# Altium PCB Cavro Ribbon Interface Top.PcbDoc
Units mil, origin at the board's own origin, x right, y up, seen from the top; angles counter-clockwise.
Board outline 2106 x 1810.7 mil, 2 copper layers (Top Layer, Bottom Layer); 49 components, 41 nets, 179 pads, 45 vias.
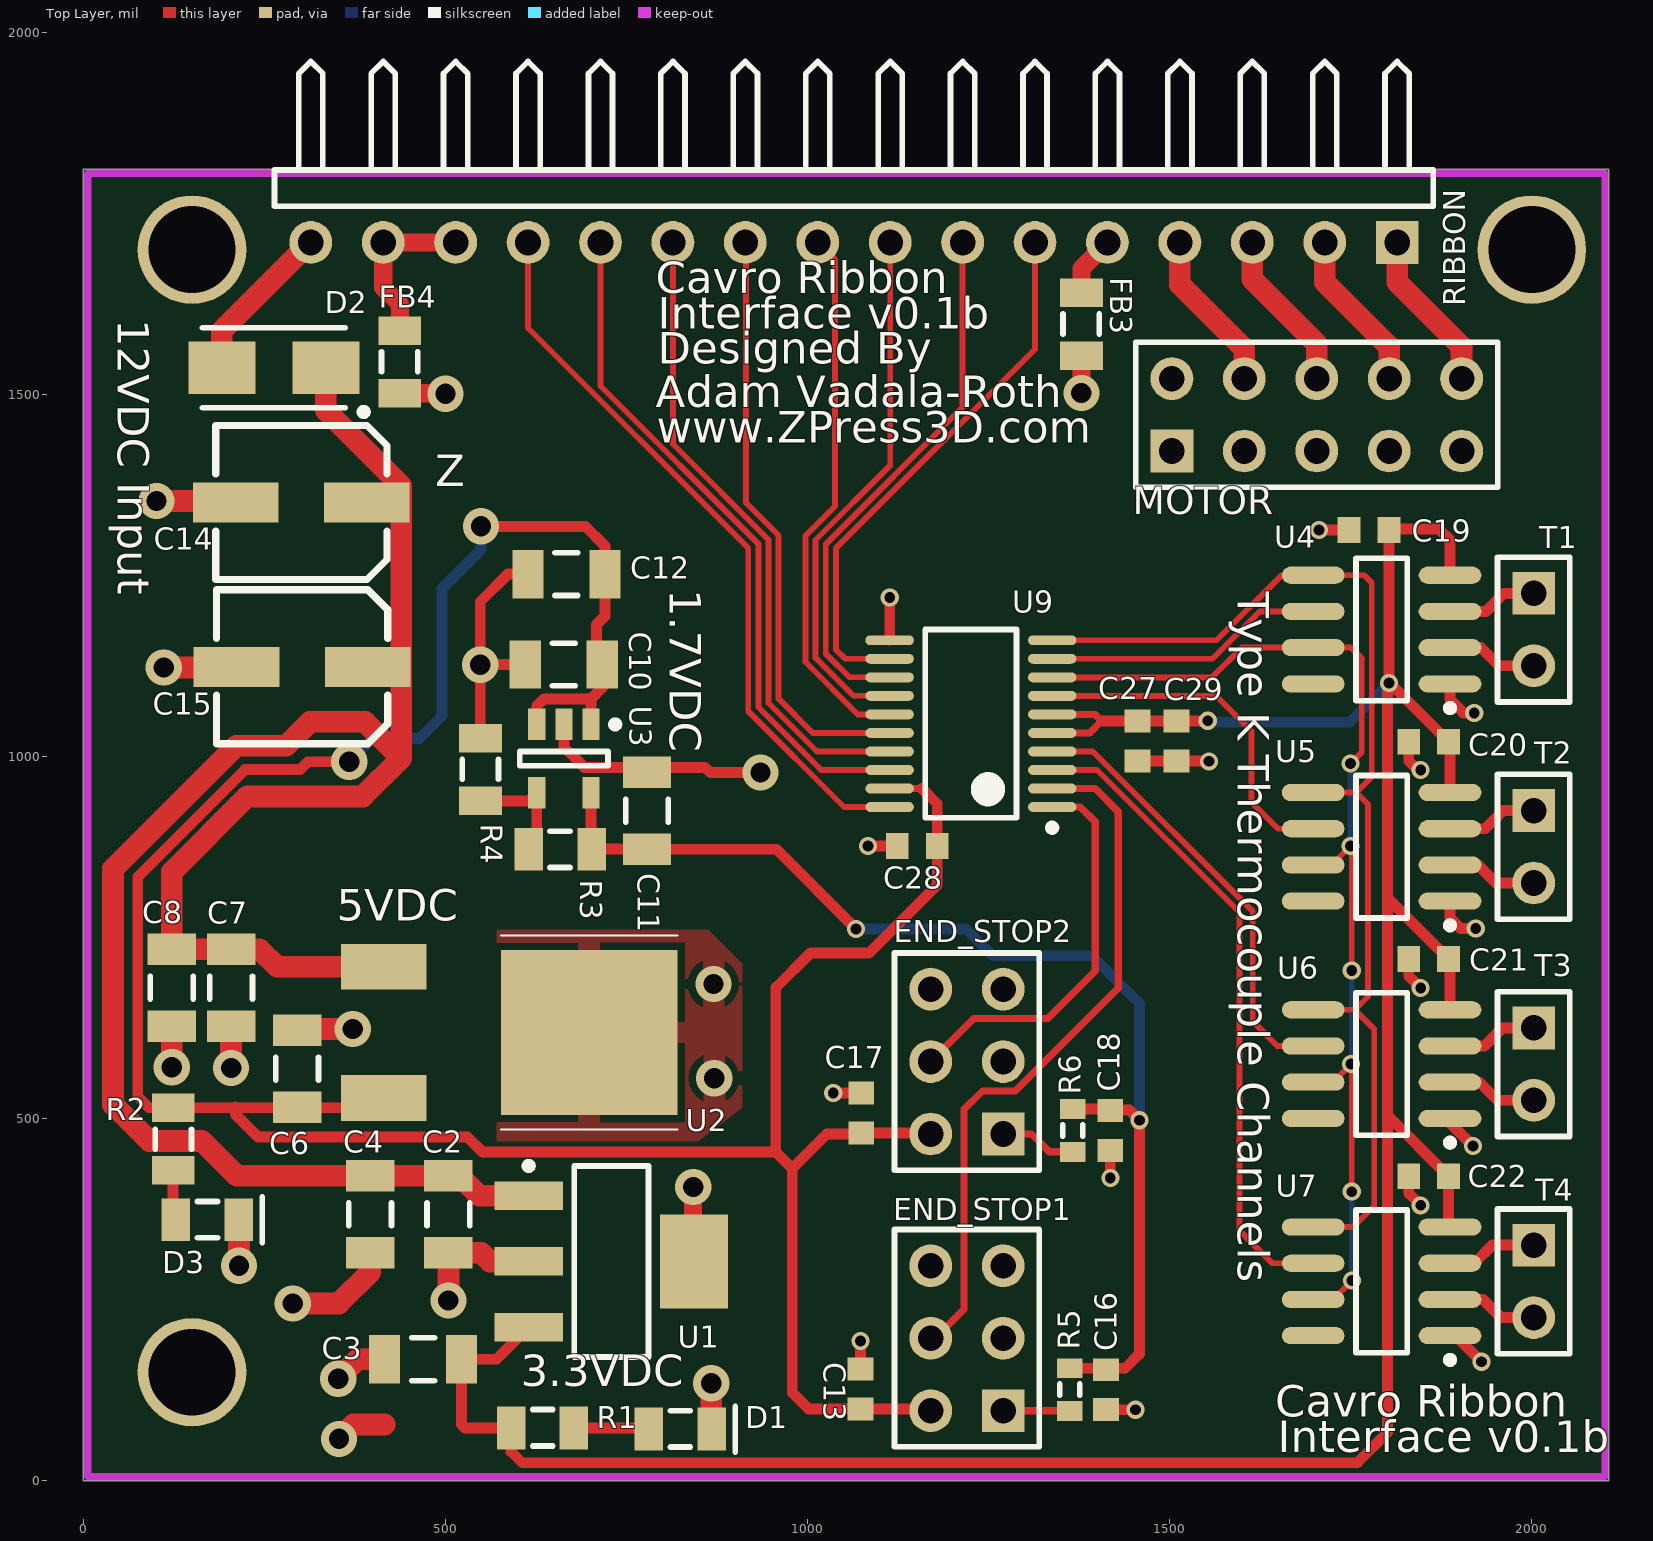
[diagram p0: Top Layer view]
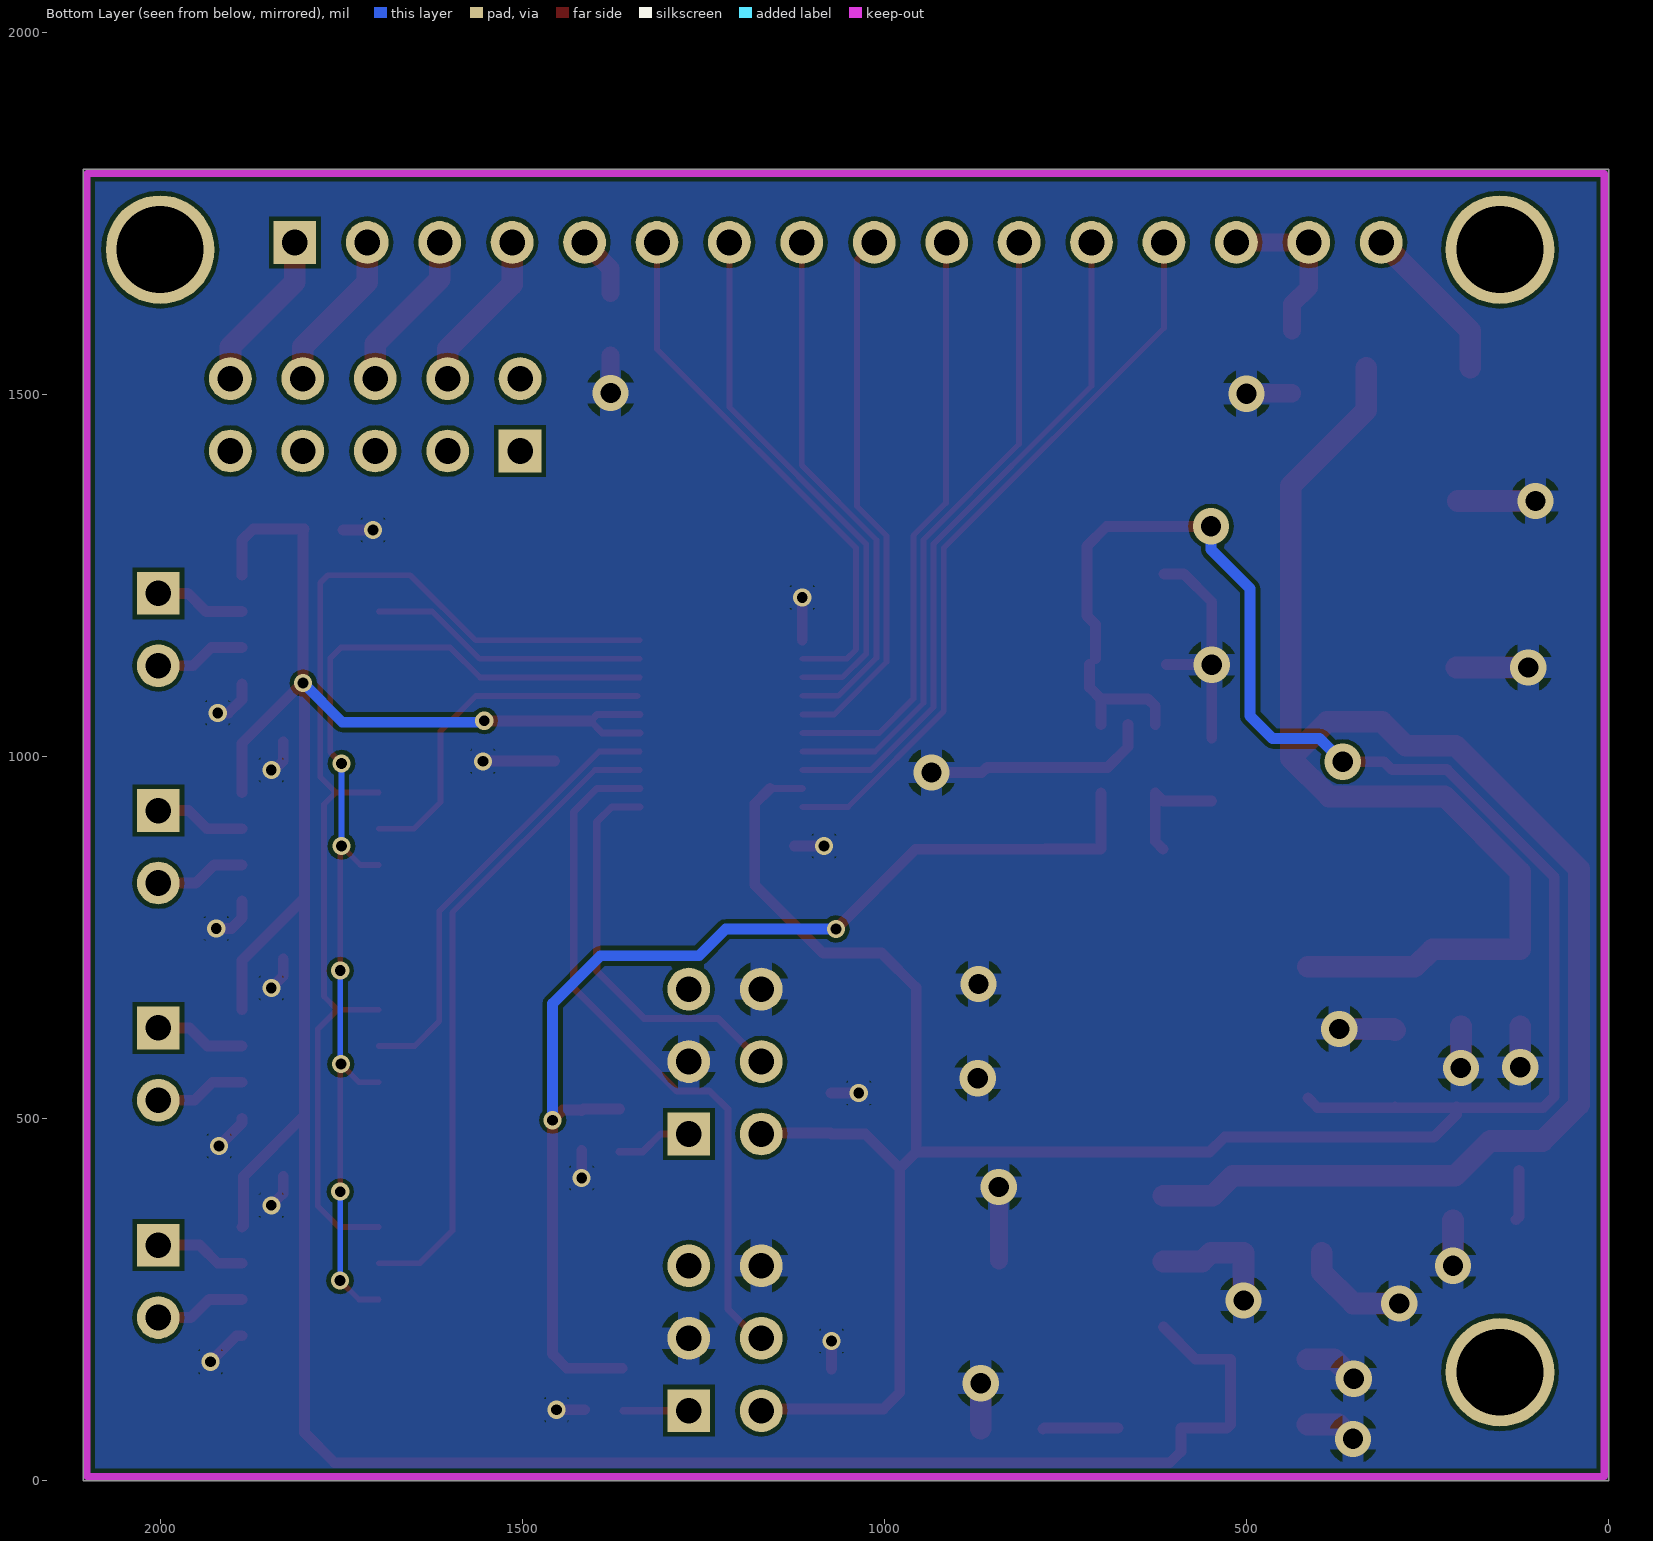
[diagram p1: Bottom Layer view, seen from below]

## Layer stack, top to bottom
Top Layer: signal copper 1.4
Dielectric: dielectric 12.6, FR-4, Dk 4.8
Bottom Layer: signal copper 1.4

## Board outline
0,0 0,1810.7 2106,1810.7 2106,0

## Design rules (kind name [scope] priority, off if disabled: settings)
Clearance [All] p1: gap=6
ComponentClearance [All] p1: gap=0 collisioncheckmode=3 verticalgap=10 showdistances=FALSE
FanoutControl Fanout_SOIC [(InComponent('U8') AND InComponent('U7'))] p3: bgadir=Out bgaviamode=Centered fanoutstyle=Staggered fanoutdirection=Alternating viagrid=1 // Fanout_SOIC (Default Rule)
FanoutControl Fanout_Small [All] p4: bgadir=Out bgaviamode=Centered fanoutstyle=Auto fanoutdirection=Alternating viagrid=1 // Fanout_Small (Default Rule)
HoleSize [All] p1: absolutevalues=TRUE maxlimit=120 minlimit=1 maxpercent=80.000 minpercent=20.000
MinimumSolderMaskSliver [All] p1 off: minsoldermaskwidth=10
PlaneConnect [All] p1: planeconnectstyle=Direct reliefexpansion=20 reliefentries=4 reliefconductorwidth=10 reliefairgap=10
PolygonConnect PolygonConnect_1 [InNet('PGND')] p1: connectstyle=Relief reliefconductorwidth=30 reliefentries=4 polygonreliefangle="90 Angle" airgapwidth=10
PolygonConnect [All] p2: connectstyle=Relief reliefconductorwidth=30 reliefentries=4 polygonreliefangle="90 Angle" airgapwidth=10
RoutingVias [All] p1: holewidth=15 width=25 viastyle="Through Hole" minholewidth=15 minwidth=25 maxholewidth=28 maxwidth=50
SilkToSilkClearance [All] p1 off: silktosilkclearance=10
SilkToSolderMaskClearance SilkscreenOverComponentPads [IsPad] p1 off: minsilkscreentomaskgap=10 clearancetoexposedcopper=TRUE
SolderMaskExpansion [All] p1: expansion=6
Width [All] p1: maxlimit=30 minlimit=6 preferedwidth=6 minimp=50.000000 maximp=50.000000 favimp=50.000000
20 further rules are at their usual default settings.

## Classes and differential pairs
component class Power: C2 C3 C4 C6 C7 C8 C10 C11 C12 D1 D3 R1 R2 R3 R4 U1 U2 U3
component class "Ribbon Interface": C13 C14 C15 C16 C17 C18 C19 C20 C21 C22 C27 C28 C29 D2 END_STOP1 END_STOP2 FB3 FB4 MOTOR R5 R6 RIBBON T1 T2 T3 T4 U4 U5 U6 U7 U9

## Components (designator, comment, footprint, x,y, rotation, side; value= is the part's Value field where it differs from the comment)
C2 "1206 Tantulum" C1206 504,368 r90 top
C3 "1206 Tantulum" C1206 469,168 r0 top
C4 "1206 Tantulum" C1206 396,368 r90 top
C6 "1206 Tantulum" C1206 295.05,569.17 r270 top
C7 "1206 Tantulum" C1206 204,681 r90 top
C8 "1206 Tantulum" C1206 122,681 r90 top
C10 "1206 Tantulum" C1206 663.4,1127.24 r0 top
C11 "1206 Tantulum" C1206 778.23,925.3 r270 top
C12 "1206 Tantulum" C1206 667,1252 r0 top
C13 "0603" 1608[0603] 1072.95,126.83 r270 top
C14 "VS C" "Panasonic VS C" 301,1351 r0 top
C15 "VS C" "Panasonic VS C" 302,1124 r0 top
C16 "0603" 1608[0603] 1412,126 r90 top
C17 "0603" 1608[0603] 1073.95,507.83 r270 top
C18 "0603" 1608[0603] 1417.95,483.83 r90 top
C19 "0603" 1608[0603] 1775,1313 r0 top
C20 "0603" 1608[0603] 1857.5,1020.5 r0 top
C21 "0603" 1608[0603] 1857.5,720.5 r0 top
C22 "0603" 1608[0603] 1857.5,420.5 r0 top
C27 "0603" 1608[0603] 1455.43,1021.57 r90 top
C28 "0603" 1608[0603] 1151.43,876.57 r0 top
C29 "0603" 1608[0603] 1509.43,1021.57 r90 top
D1 "LED2" "SM 0805 polarized" 904,28 r180 top
D2 "PMEG4050EP" PMEG4050EP 263,1537 r180 top
D3 "LED2" "SM 0805 polarized" 251,317 r180 top
END_STOP1 "Header 3X2" HDR2X3 1270,97 r90 top
END_STOP2 "Header 3X2" HDR2X3 1270,479 r90 top
FB3 "Ferrite" "SM 0805 - gap trimmed" 1378,1597 r270 top
FB4 "Ferrite" "SM 0805 - gap trimmed" 437,1545 r270 top
MOTOR "Header 5X2" HDR2X5 1503,1422 r0 top
R1 "Res3" "SM 0805 - gap trimmed" 634,73 r180 top
R2 "Res3" "SM 0805 - gap trimmed" 124,472 r90 top
R3 "Res3" "SM 0805 - gap trimmed" 658.4,872.24 r0 top
R4 "Res3" "SM 0805 - gap trimmed" 548.4,982.24 r270 top
R5 "0603" J1-0603 1362,126 r270 top
R6 "0603" J1-0603 1365.95,483.83 r270 top
RIBBON "Header 16H" HDR1X16H 1814,1710 r180 top locked
T1 "Header 2" HDR1X2 2002.5,1225.5 r270 top
T2 "Header 2" HDR1X2 2002.5,925.5 r270 top
T3 "Header 2" HDR1X2 2002.5,625.5 r270 top
T4 "Header 2" HDR1X2 2002.5,325.5 r270 top
U1 "TLV117113" TLV117112 729,303 r0 top
U2 "LM7805-ST 800ma" DPAK-3 415.05,619.17 r270 top
U3 "TPS73101" TPS73101 663.4,997.24 r270 top
U4 "MAX31855EASA+" MAXM-S8+4_N 1792.5,1175.5 r180 top
U5 "MAX31855EASA+" MAXM-S8+4_N 1792.5,875.5 r180 top
U6 "MAX31855EASA+" MAXM-S8+4_N 1792.5,575.5 r180 top
U7 "MAX31855EASA+" MAXM-S8+4_N 1792.5,275.5 r180 top
U9 "TXB0108" TXB0108 1225.43,1045.57 r180 top

## Footprints (in the part's own frame and the unit in brackets; to place one, negate y for a bottom-side part, rotate by r counter-clockwise, add the part's x,y. Pads: shape width x height; smd on the part's side, far side on the other; paste and mask are expansions set on the pad)
1608[0603] [mm] "Chip Capacitor, Body 1.6x0.8mm, IPC High Density"
  rect 0.8x0.9 smd: 1(-0.7,0) 2(0.7,0)
  body extent -0.87,-0.48 0.87,0.48, height 1.3
C1206 [mm] "Chip Capacitor, Body 3.2x1.6mm, IPC High Density"
  rect 1.1x1.7 smd: 1(-1.35,0) 2(1.35,0)
  silkscreen extent -0.4,-0.75 0.4,0.75, body extent -1.7,-0.9 1.7,0.9, height 1.3
DPAK-3 [mm] "Case 369C-01 for MC78xx regulators"
  rect 1.6x3 smd: 1(-2.3,0) 3(2.3,0)
  rect 5.8x6.2 smd: 2(0,7.2)
  silkscreen extent -3.4,4.1 3.4,10.3, body extent -3.4,4.1 3.4,10.3, height 2.38
HDR1X2 [mm] "Connector; Header; 2 Position"
  rect 1.5x1.5 hole 0.9: 1(0,0)
  round 1.5 hole 0.9: 2(2.54,0)
  silkscreen extent -1.27,-1.27 3.81,1.27
HDR1X16H [mm] "Connector; Header; 16 Position; Right Angle"
  rect 1.5x1.5 hole 0.9: 1(0,0)
  round 1.5 hole 0.9: 2(2.54,0) 3(5.08,0) 4(7.62,0) 5(10.16,0) 6(12.7,0) 7(15.24,0) 8(17.78,0) 9(20.32,0) 10(22.86,0) 11(25.4,0) 12(27.94,0) 13(30.48,0) 14(33.02,0) 15(35.56,0) 16(38.1,0)
  silkscreen extent -1.27,-6.35 39.37,-1.27
HDR2X3 [mm] "Connector; Header; 3x2 Position"
  rect 1.5x1.5 hole 0.9: 1(0,0)
  round 1.5 hole 0.9: 2(0,2.54) 3(2.54,0) 4(2.54,2.54) 5(5.08,0) 6(5.08,2.54)
  silkscreen extent -1.27,-1.27 6.35,3.81
HDR2X5 [mm] "Connector; Header; 5x2 Position"
  rect 1.5x1.5 hole 0.9: 1(0,0)
  round 1.5 hole 0.9: 2(0,2.54) 3(2.54,0) 4(2.54,2.54) 5(5.08,0) 6(5.08,2.54) 7(7.62,0) 8(7.62,2.54) 9(10.16,0) 10(10.16,2.54)
  silkscreen extent -1.27,-1.27 11.43,3.81
J1-0603 [mm] "Chip Resistor, Body 1.6x0.8mm, IPC High Density"
  rect 0.7x0.9 smd: 1(-0.75,0) 2(0.75,0)
  silkscreen extent -0.2,-0.35 0.2,0.35, body extent -0.85,-0.48 0.85,0.48, height 0.9
MAXM-S8+4_N [mm] "SOIC, 8-Leads, Body 4.9x3.9mm, Pitch 1.27mm, IPC Medium Density"
  oval 2.2x0.6 smd: 1(-2.4,1.905) 2(-2.4,0.635) 3(-2.4,-0.635) 4(-2.4,-1.905) 5(2.4,-1.905) 6(2.4,-0.635) 7(2.4,0.635) 8(2.4,1.905)
  silkscreen extent -2.53,-2.5 0.9,2.88, body extent -2,-2.5 2,2.5, height 1.75
"Panasonic VS C" [mm]
  rect 3x1.4 smd: 1(2.3,0) 2(-2.3,0)
  silkscreen extent -3,-2.7 3,2.7
PMEG4050EP [mm] "PMEG4050EP NXP SMD Schottky Diode"
  rect 2.35x1.85 smd: 1(-1.825,0) 2(1.825,0)
  silkscreen extent -3.28,-1.4 2.5,1.67, body extent -2.5,-1.35 2.5,1.35, height 1.1
"SM 0805 - gap trimmed" [mm]
  rect 1x1.5 smd: 1(-1.1,0) 2(1.1,0)
  silkscreen extent -0.36,-0.64 0.35,0.63
"SM 0805 polarized" [mm]
  rect 1x1.5 smd: 1(0.93,-1.105) 2(3.13,-1.105)
  silkscreen extent 0.1,-1.9 2.38,-0.3
TLV117112 [mm] "SOT223, 4-Leads, Body 6.7x7.3mm (max), Pitch 2.30mm, IPC Medium Density"
  rect 2.4x1 smd: 1(-2.9,2.3) 2(-2.9,0) 3(-2.9,-2.3)
  rect 2.4x3.3 smd: 4(2.9,0)
  silkscreen extent -3.02,-3.35 1.3,3.47, body extent -1.85,-3.35 1.85,3.35, height 1.8
TPS73101 [mm] "SOT23, 5-Leads, Body 2.90x2.80mm, Pitch 0.95mm, IPC Medium Density"
  rect 1.1x0.6 smd: 1(-1.2,0.95) 2(-1.2,0) 3(-1.2,-0.95) 6(1.2,-0.95) 8(1.2,0.95)
  silkscreen extent -1.32,-1.55 0.25,1.93, body extent -0.87,-1.52 0.87,1.53, height 1.45
TXB0108 [mm] "TSOP, 20-Leads, Body 6.50x4.40mm, Pitch 0.65mm, IPC Medium Density"
  oval 1.7x0.35 smd: 1(-2.85,2.925) 2(-2.85,2.275) 3(-2.85,1.625) 4(-2.85,0.975) 5(-2.85,0.325) 6(-2.85,-0.325) 7(-2.85,-0.975) 8(-2.85,-1.625) 9(-2.85,-2.275) 10(-2.85,-2.925) 11(2.85,-2.925) 12(2.85,-2.275) 13(2.85,-1.625) 14(2.85,-0.975) 15(2.85,-0.325) 16(2.85,0.325) 17(2.85,0.975) 18(2.85,1.625) 19(2.85,2.275) 20(2.85,2.925)
  silkscreen extent -2.98,-3.3 1.6,3.77, body extent -2.25,-3.3 2.25,3.3, height 1.2

## Part data
C2 C3 C4 C6 C7 C8 C10 C11 C12 C13 C16 C17 C18 C19 C20 C21 C22 C27 C28 C29: library part "Cap Semi", "Capacitor (Semiconductor SIM Model)"
C14 C15: library part "Cap Pol1", "Polarized Capacitor (Radial)"
D1 D3: "Typical RED, GREEN, YELLOW, AMBER GaAs LED"
D2: library part Diode, "Default Diode"
END_STOP1 END_STOP2: "Header, 3-Pin, Dual row"
FB3 FB4: library part Inductor, "Inductor"
MOTOR: "Header, 5-Pin, Dual row"
R1 R2 R3 R4: "Resistor"
R5 R6: library part Res3, "Resistor"
RIBBON: "Header, 16-Pin, Right Angle"
T1 T2 T3 T4: "Header, 2-Pin"
U1: library part TLV117112, "Linear Regulator"
U2: library part "LM708-ST 800ma"
U3: "Ti TPS73101 Adjustable LDO"
U4 U5 U6 U7: "Cold Junction Compensated Thermocouple to Digital Converter, 14 Bits Temperature Resolution, -40 to 125 degC, 8-Pin SOIC (S8+4), Pb-Free"
U9: "Ti TXB0108 Bidirectional Level Translator"

## Free pads (board coordinates)
  round 150 hole 120: 1(150,150) 1(150,1700) 1(2000,1700)

## Via types
v1: diameter 25, hole 15, Top Layer to Bottom Layer, 25 vias
v2: diameter 50, hole 28, Top Layer to Bottom Layer, 20 vias

## Nets (pads, with @x,y where several pads share a name; then routed paths per layer and width w, separated by ;. In a path a pad name is that pad's centre, name@x,y a point inside that pad or via, vN(x,y) a via of type N, cw(c..) or ccw(c..) an arc to the next point about the centre after c; other vN are vias at no path point)
+1.7VCC: C11.2 C16.2 C18.2 R3.2 R5.1 R6.1 U3.8 | length 1609.7
  Top Layer w15: U3.8 700.8,873.15 R3.2 C11.2@778.23,872.24 ; C11.2 865.23,872.15 956.85,872.15 v1(1067,762) ; R5.1 1438.53,155.53 1458,175 v1(1458,498) 1444,512 1418.56,512 C18.2 1415.98,513.36 R6.1
  Bottom Layer w15: v1(1067,762) 1219,762 1256,725 1392,725 1458,659 v1(1458,498)
+3.3VCC: C3.2 C19.2 C20.2 C21.2 C22.2 C27.2 C29.2 R1.2 U1.3 U4.4 U5.4 U6.4 U7.4 U9.5 U9.6 | length 4068.1
  Top Layer w10: U9.5 1389.52,1032.77 1405.87,1049.13 1396.64,1058.36 U9.6
  Top Layer w15: U1.3 570.38,168 C3.2 522.15,78 527.15,73 R1.2 590.69,40.31 606,25 1759,25 1800.69,66.69 1800.69,504.87 ; 1405.87,1049.13 C27.2 C29.2 1551.99,1049.13 v1(1552.43,1049.57) ; v1(1802.5,1101.5) v1@1802.5,1103.06 ; U7.4 1885.06,352.43 C22.2 1800.69,504.87 ; U6.4 1886.99,718.57 C21.2 1800.69,804.87 ; U5.4 1886.99,1018.57 C20.2 v1@1802.5,1103.06 ; U4.4 1886.99,1299.01 1871.5,1314.5 1801.06,1314.5 1802.5,1313.06 v1@1802.5,1103.06 ; 1800.69,504.87 1800.69,804.87 ; 1800.69,804.87 1800.69,1104.87 v1@1802.5,1103.06
  Bottom Layer w15: v1(1552.43,1049.57) 1554.5,1047.5 1748.5,1047.5 v1(1802.5,1101.5)
+5VCC: C6.2 C10.2 C12.2 C13.2 C17.2 C28.2 END_STOP1.2 END_STOP2.2 R2.2 U2.3 U3.1 U3.3 U9.19 | length 4225
  Top Layer w10: C10.2@708.4,1135.39 C10.2 ; U9.19 1158,956
  Top Layer w15: 210.05,516.02 210.05,515.31 ; C6.2 C6.2@294.34,515.31 ; v2(367,993) 310,993 299,982 223,982 75.04,834.04 75.04,530.96 90.69,515.31 R2.2 210.05,515.31 ; U2.3 401.74,515.31 C6.2@294.34,515.31 ; v2(549,1318) 693,1318 720.33,1290.67 720.33,1252.24 720.33,1194.17 708.4,1182.24 C10.2@708.4,1135.39 ; U3.3 626,1069.84 635.8,1079.65 700.8,1079.65 ; U3.1 700.8,1079.65 ; C10.2 716.55,1095.39 700.8,1079.65 ; 1158,956 1178.99,935.01 C28.2 1178.99,822.99 1085,729 1004,729 956,681 956,454 ; END_STOP1.2@1167.73,99.27 C13.2 1001.46,99.27 978.73,122 978.73,431.27 ; END_STOP2.2 1168.73,480.27 C17.2 1072.68,479 1026.46,479 978.73,431.27 ; 210.05,515.31 210.05,505.95 241,475 530,475 551,454 956,454 ; 210.05,515.31 C6.2@294.34,515.31 ; 956,454 978.73,431.27
  Bottom Layer w15: v2(367,993) 399,1025 464,1025 495,1056 495,1232 549,1286 v2(549,1318)
+12VCC: C2.2 C4.2 C7.2 C8.2 C14.1 C15.1 D2.1 U1.1 U2.1 | length 2828.3
  Top Layer w30: D2.1 334.85,1478.15 438.93,1374.07 438.93,997.93 ; U2.1 267.57,709.72 243.14,734.15 C8.2 122,840.69 226.3,945 386,945 438.93,997.93 ; U1.1 546.45,393.55 518.85,421.15 C2.2 211.85,421.15 163.62,469.38 91.02,469.38 41,519.4 41,845 211,1015 280,1015 313,1048 388.86,1048 438.93,997.93
CS_T1: U4.6 U9.9 | length 387.5
  Top Layer w8: U9.9 1558.8,1135.13 1558.87,1135.07 1624.3,1200.5 U4.6
CS_T2: U5.6 U9.7 | length 490.7
  Top Layer w8: U9.7@1340.7,1083.89 1564.11,1083.89 1613,1035 1613,937 1649.5,900.5 U5.6
CS_T3: U6.6 U9.4 | length 617.9
  Top Layer w8: U9.4 1393.83,1007.18 1614.5,786.51 1614.5,634.5 1648.5,600.5 U6.6
CS_T4: U7.6 U9.3 | length 899.8
  Top Layer w8: U9.3 1399.62,981.59 1596.5,784.71 1596.5,345.5 1641.5,300.5 U7.6
ES1_OUT: END_STOP1.4 U9.2 | length 969
  Top Layer w10: END_STOP1.4 1176,197 1216,237 1216,513 1241.47,538.47 1286.79,538.47 1429,680.69 1429,924 1397,956 U9.2
ES2_OUT: END_STOP2.4 U9.1 | length 552.6
  Top Layer w10: END_STOP2.4 1229.47,638.47 1331.47,638.47 1397,704 1397,910 1376.59,930.41 U9.1
GND: C2.1 C3.1 C4.1 C6.1 C7.1 C8.1 C10.1 C11.1 C12.1 C13.1 C14.2 C15.2 C16.1 C17.1 C18.1 C19.1 C20.1 C21.1 C22.1 C27.1 C28.1 C29.1 D1.1 D3.1 END_STOP1.3 END_STOP1.6 END_STOP2.3 END_STOP2.6 FB3.2 FB4.2 R4.1 U1.2 U1.4 U2.2 U3.2 U4.1 U5.1 U6.1 U7.1 U9.11 | length 2647
  Top Layer w8: v2@499.31,1501.69 v2(500,1501) ; D1.1@866.95,71.94 D1.1
  Top Layer w15: C14.2@208.45,1353 C14.2 ; C15.2@210.45,1123 C15.2 ; R4.1@548,1025.95 v2(548,1127) ; C10.1 610.01,1127 v2(548,1127) ; C12.1 586.23,1252 548,1213.77 v2(548,1127) ; U3.2 663.4,1013.6 691.85,985.15 858.52,985.15 865.23,978.45 ; 865.68,978 v2(935,978) ; v1(1035.39,535.39) C17.1 ; C13.1 v1(1072.95,192.95) ; v1(1083.43,876.57) C28.1 ; U9.11@1113.43,1160.93 v1(1113.43,1219.57) ; C16.1@1413.95,98.27 v1(1452.51,98.27) ; v1(1417.95,418.05) C18.1 ; C27.1 C29.1 1553.99,994.01 v1(1554.43,993.57) ; v1(1706,1313) C19.1 ; C22.1 1829.94,397.06 v1(1846.5,380.5) ; C21.1 1829.94,697.06 v1(1846.5,680.5) ; C20.1 1829.94,994.06 1842.5,981.5 v1(1846.5,981.5) ; U7.1 1894.5,200.5 v1(1930.5,164.5) ; U6.1 1886.99,494.01 v1(1918.5,462.5) ; U5.1 1886.99,777.01 1901.5,762.5 v1(1922.5,762.5) ; U4.1 1886.99,1079.01 1905.5,1060.5 v1(1920.5,1060.5)
  Top Layer w25: FB4.2 v2@499.31,1501.69 ; U1.4@841.95,304.23 v2(841.95,405.83) ; v2(1378,1502) FB3.2
  Top Layer w30: v2(101,1353) C14.2@208.45,1353 ; v2(111,1123) C15.2@210.45,1123 ; v2(122,571) C8.1 ; v2(204,570) C7.1 ; v2(215,297) D3.1@215,359.89 ; v2(289,245) 352.93,245 396,288.07 C4.1 ; C6.1 296.73,624 v2(372,624) ; v2(352,141) 379,168 C3.1 ; v2(353,58) 373,78 415.85,78 ; v2(504,249) C2.1 549.15,314.85 561,303 U1.2 ; D1.1@866.95,71.94 v2(866.95,134.83)
  other v2: 871,556 870,686
MISO: U4.7 U5.7 U6.7 U7.7 U9.8 | length 1506.8
  Top Layer w8: U9.8 1337.7,1109.48 1558.48,1109.48 1599.5,1150.5 U4.7 1750.5,1150.5 1765,1136 1765,1006 v1(1749.5,990.5) ; U7.7 1725.5,250.5 v1(1751.5,276.5) ; U6.7 1725.5,550.5 v1(1750.5,575.5) 1751.32,574.68 v1(1751.32,399.32) ; U5.7 1723.5,850.5 v1(1749.5,876.5) 1751.32,874.68 v1(1751.32,704.68)
  Bottom Layer w8: v1(1749.5,876.5) v1(1749.5,990.5) ; v1@1751.32,276.5 v1(1751.32,399.32) ; v1@1751.32,575.5 v1(1751.32,704.68)
NetD1_2: D1.2 R1.1 | length 104.1
  Top Layer w15: R1.1 779.28,73 D1.2
NetD2_2: D2.2 RIBBON.16 | length 225.9
  Top Layer w30: D2.2 191.15,1588.15 314,1711 RIBBON.16
NetD3_2: D3.2 R2.1 | length 69.8
  Top Layer w15: R2.1 124,364.28 D3.2
NetEND_STOP1_1: END_STOP1.1 R5.2 | length 91
  Top Layer w10: END_STOP1.1 R5.2@1361,97
NetEND_STOP2_1: END_STOP2.1 R6.2 | length 106.2
  Top Layer w10: END_STOP2.1 1309,479 1333.7,454.3 R6.2
NetFB3_1: FB3.1 RIBBON.5 | length 84.6
  Top Layer w25: FB3.1 1378,1674 RIBBON.5
NetFB4_1: FB4.1 RIBBON.14 RIBBON.15 | length 231.2
  Top Layer w25: FB4.1 437,1625 414,1648 RIBBON.15 RIBBON.14
NetMOTOR_4: MOTOR.4 RIBBON.4 | length 224.9
  Top Layer w30: RIBBON.4 1514,1652 1603,1563 MOTOR.4
NetMOTOR_6: MOTOR.6 RIBBON.3 | length 224.9
  Top Layer w30: RIBBON.3 1614,1659 1703,1570 MOTOR.6
NetMOTOR_8: MOTOR.8 RIBBON.2 | length 224.9
  Top Layer w30: RIBBON.2 1714,1655 1803,1566 MOTOR.8
NetMOTOR_10: MOTOR.10 RIBBON.1 | length 224.9
  Top Layer w30: RIBBON.1 1814,1655 1903,1566 MOTOR.10
NetR3_1: R3.1 R4.2 U3.6 | length 164.5
  Top Layer w15: R4.2 614.94,938.94 U3.6 626,883.15 R3.1
NetRIBBON_6: RIBBON.6 U9.12 | length 755.5
  Top Layer w8: U9.12 1051.87,1135.13 1039,1148 1039,1287.6 1314,1562.6 RIBBON.6
NetRIBBON_7: RIBBON.7 U9.13 | length 747.8
  Top Layer w8: U9.13 1057.66,1109.54 1025,1142.2 1025,1293.4 1214,1482.4 RIBBON.7
NetRIBBON_8: RIBBON.8 U9.14 | length 740.2
  Top Layer w8: U9.14 1063.45,1083.95 1011,1136.4 1011,1299.2 1114,1402.2 RIBBON.8
NetRIBBON_9: RIBBON.9 U9.15 | length 752.5
  Top Layer w8: RIBBON.9 1038,1686 1038,1346 997,1305 997,1130.6 1069.24,1058.36 U9.15
NetRIBBON_10: RIBBON.10 U9.16 | length 821.8
  Top Layer w8: RIBBON.10 915,1709 915,1350.4 960,1305.4 960,1080 1007.23,1032.77 U9.16
NetRIBBON_11: RIBBON.11 U9.17 | length 885.5
  Top Layer w8: RIBBON.11 814,1431.6 946,1299.6 946,1074.2 1013.02,1007.18 U9.17
NetRIBBON_12: RIBBON.12 U9.18 | length 949.1
  Top Layer w8: RIBBON.12 714,1511.8 932,1293.8 932,1068.4 1018.81,981.59 U9.18
NetRIBBON_13: RIBBON.13 U9.20 | length 1023.3
  Top Layer w8: RIBBON.13 614,1592 918,1288 918,1062.6 1050.19,930.41 U9.20
NetT1_1: T1.1 U4.3 | length 125.9
  Top Layer w15: U4.3 1936.5,1200.5 1961.5,1225.5 T1.1
NetT1_2: T1.2 U4.2 | length 125.9
  Top Layer w15: U4.2 1929.5,1150.5 1954.5,1125.5 T1.2
NetT2_1: T2.1 U5.3 | length 125.9
  Top Layer w15: U5.3 1935.5,900.5 1960.5,925.5 T2.1
NetT2_2: T2.2 U5.2 | length 125.9
  Top Layer w15: U5.2 1925.5,850.5 1950.5,825.5 T2.2
NetT3_1: T3.1 U6.3 | length 125.9
  Top Layer w15: U6.3 1934.5,600.5 1959.5,625.5 T3.1
NetT3_2: T3.2 U6.2 | length 125.9
  Top Layer w15: U6.2 1927.5,550.5 1952.5,525.5 T3.2
NetT4_1: T4.1 U7.3 | length 125.9
  Top Layer w15: U7.3 1920.5,300.5 1945.5,325.5 T4.1
NetT4_2: T4.2 U7.2 | length 125.9
  Top Layer w15: U7.2 1932.5,250.5 1957.5,225.5 T4.2
SCLK: U4.5 U5.5 U6.5 U7.5 U9.10 | length 1591.4
  Top Layer w8: U9.10 1564.59,1160.72 1564.66,1160.66 1654.5,1250.5 U4.5 1768.5,1250.5 1779,1240 1779,972 1757.5,950.5 ; U7.5 1753.5,350.5 1782.5,379.5 1782.5,623.5 1755.5,650.5 ; U6.5 1755.5,650.5 ; U5.5 1757.5,950.5 ; 1755.5,650.5 1773.82,668.82 1773.82,934.18 1757.5,950.5
pads on no net: END_STOP1.5 END_STOP2.5 MOTOR.1 MOTOR.2 MOTOR.3 MOTOR.5 MOTOR.7 MOTOR.9 U4.8 U5.8 U6.8 U7.8

## Polygon pours and split planes (outlines as drawn)
GND on Top Layer "Top Layer-No Net" (solid, remove dead copper, pour order 10): 571,761 571,469 849,469 910,515 910,714 863,761
GND on Bottom Layer "Top Layer-No Net" (solid, remove dead copper, pour order 4): 0,1 0,71 0,1810 21,1810 2105,1810 2105,1788 2105,1

## Keep-outs
Keep-Out Layer:
  lines w10: 6,6.17 2101,6.17 2101,1805 6,1805 6,6.17

## Silkscreen, mask and mechanical layers (free items; w line width, h text height)
Top Overlay:
  text "Cavro Ribbon" at 790,1625 h75
  text "12VDC Input" at 33,1604 h75 r270
  text "Interface v0.1b" at 793,1576 h75
  text "Designed By" at 793,1528 h75
  text "Adam Vadala-Roth" at 790,1468 h75
  text "www.ZPress3D.com" at 792,1419 h75
  text "Z" at 486,1359 h75
  text "1.7VDC" at 795,1231 h75 r270
  text "Type K Thermocouple Channels" at 1579.5,1227.5 h75 r270
  text "5VDC" at 350,759 h75
  text "3.3VDC" at 604,116 h75
  text "Cavro Ribbon" at 1646,74 h75
  text "Interface v0.1b" at 1649,25 h75
Mechanical 15:
  lines w5: -890.83,-827.1 ccw(c-827.83,-827.09) -827.83,-890.09 ccw(c-827.84,-827.09) -764.84,-827.1 ccw(c-827.83,-827.09) -827.83,-764.1 ccw(c-827.84,-827.09) -890.83,-827.1 ; 0,0 0,1810.7 2106,1810.7 2106,0 0,0 ; 2475.31,-827.1 ccw(c2538.32,-827.08) 2538.32,-890.09 ccw(c2538.31,-827.09) 2601.31,-827.1 ccw(c2538.32,-827.1) 2538.32,-764.1 ccw(c2538.31,-827.1) 2475.31,-827.1